# EAGLE board wordclock-r6-4x6 (EAGLE 5.11)
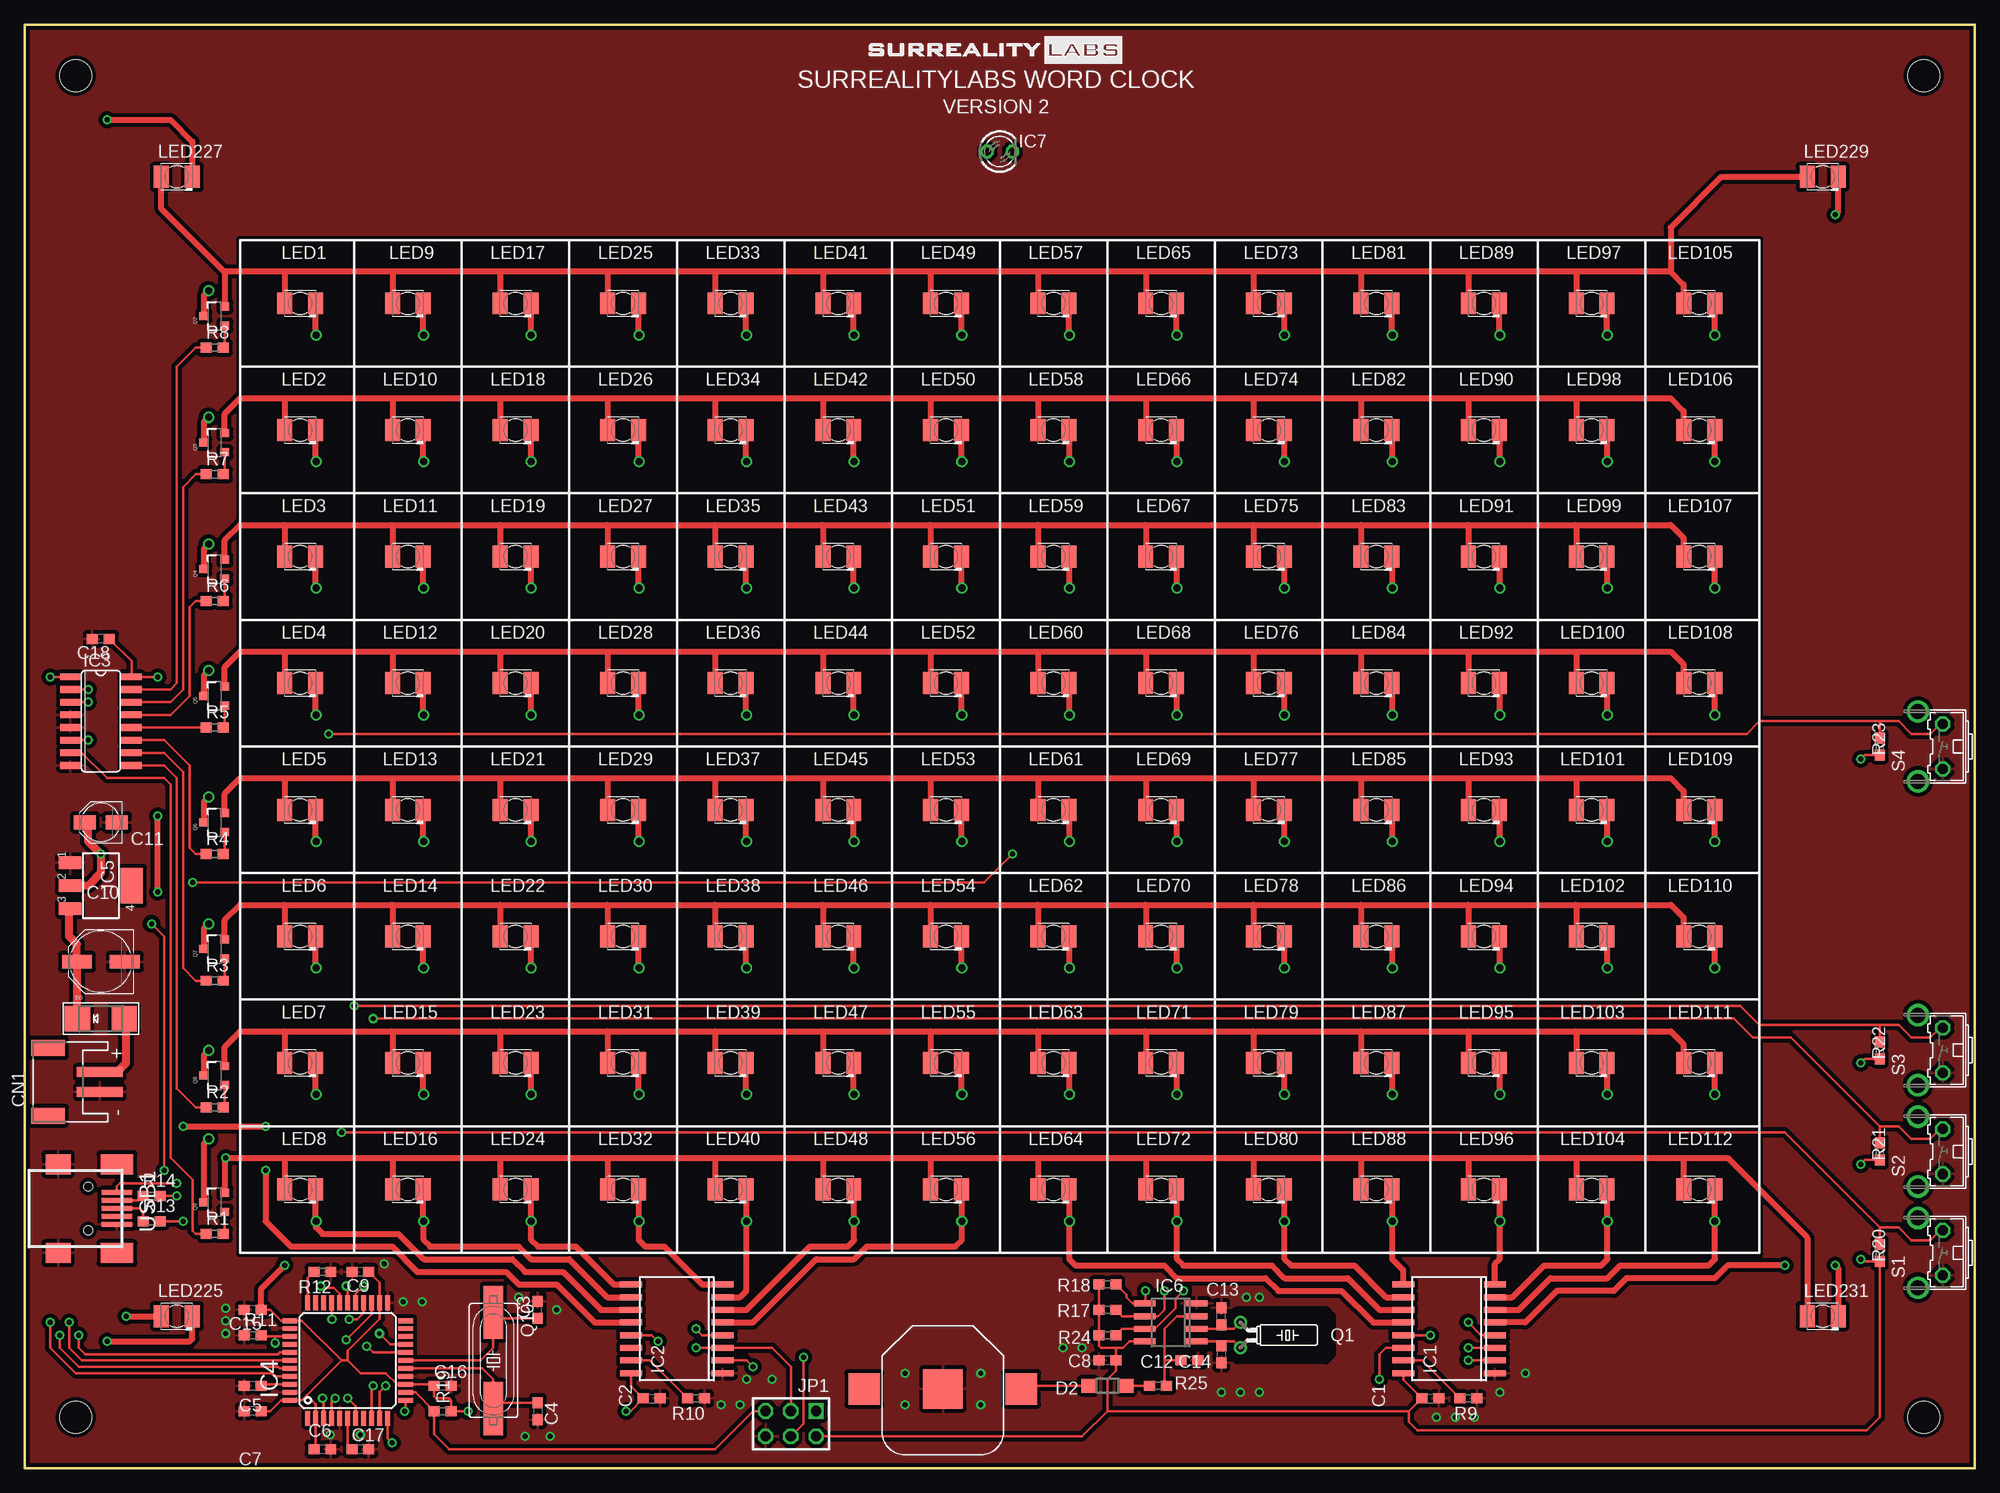
[diagram p0: board, top side]
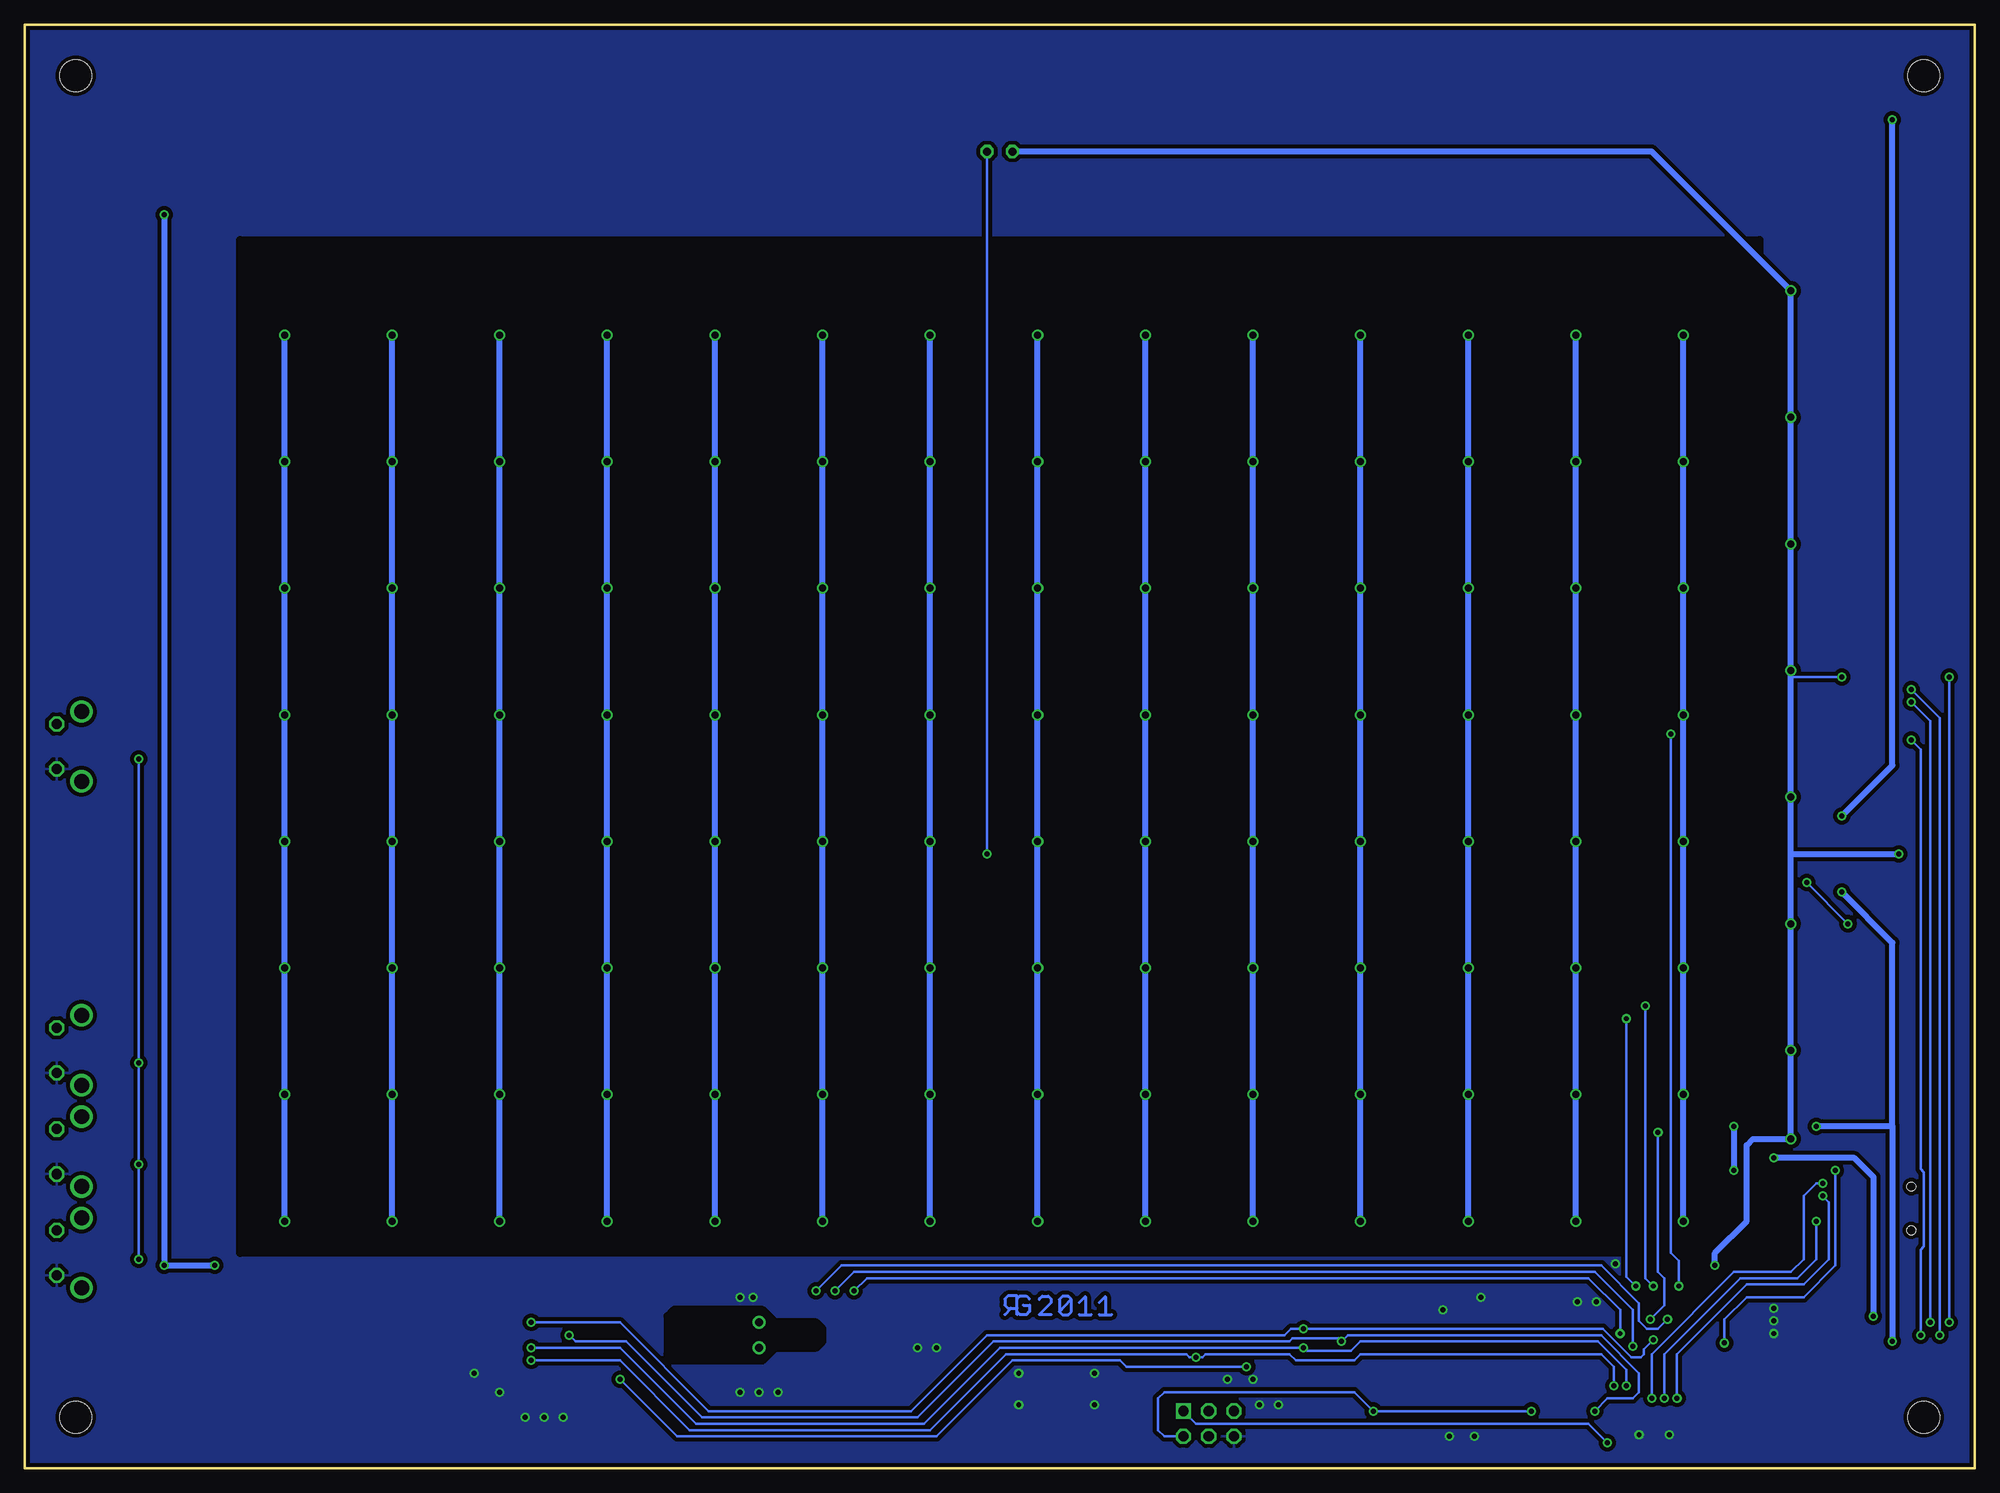
[diagram p1: board, bottom side, seen from below]

Size 195.58 x 144.78 mm. Coordinates in mm from the lower left corner, seen from the top.
Outline: 0,144.78 0,0 195.58,0 195.58,144.78 0,144.78
Copper layers (1*16): Top 0.035mm / dielectric 1.5mm / Bottom 0.035mm
Design rules "default *": minimum track width 10mil, minimum drill 19mil, track to track 10mil, track to pad 10mil, pad to pad 10mil, via to via 10mil, smd to smd 10mil, copper to edge 10mil, drill to drill 8mil, minimum pad ring 10mil, minimum via ring 8mil, stop-mask expansion 4mil, vias tented up to drill 20mil, thermal gap 16mil
Holes 3.2 mm at 5.08,139.7 190.5,139.7 190.5,5.08 5.08,5.08
tRestrict: 16 lines
bRestrict: 16 lines

## Footprints (pad centres in the part's own frame; a part is rotated, then mirrored left to right if it is on the bottom)
BATTCON_12MM = smd 3.962 x 3.962: GND 0,0 | smd 3.175 x 3.175: PWR@1 -7.874,0; PWR@2 7.874,0
C0603 = smd 1.1 x 1: 1 -0.85,0; 2 0.85,0
PANASONIC_D = smd 3 x 1.4: + 2.4,0; - -2.4,0
PANASONIC_B = smd 2.2 x 1.4: + 1.6,0; - -1.6,0
JST-PH-2-SMT-RA = smd 1 x 4.6: 1 1,-3.7; 2 -1,-3.7 | smd 1.6 x 3.4: NC1 -3.4,1.5; NC2 3.4,1.5
SOD123 = smd 1.4 x 1.4: A 1.9,0; C -1.9,0
SMADIODE = smd 2.54 x 2.54: A 2.349,0; C -2.349,0
SOIC-16-MFG = smd 0.6 x 2.2: 1 -3.81,-4.6; 2 -2.54,-4.6; 3 -1.27,-4.6; 4 0,-4.6; 5 1.27,-4.6; 6 2.54,-4.6; 7 3.81,-4.6; 8 5.08,-4.6; 9 5.08,4.6; 10 3.81,4.6; 11 2.54,4.6; 12 1.27,4.6; 13 0,4.6; 14 -1.27,4.6; 15 -2.54,4.6; 16 -3.81,4.6
SO16 = smd 0.66 x 2.032: 1 -4.445,-3.073; 2 -3.175,-3.073; 3 -1.905,-3.073; 4 -0.635,-3.073; 5 0.635,-3.073; 6 1.905,-3.073; 7 3.175,-3.073; 8 4.445,-3.073; 9 4.445,3.073; 10 3.175,3.073; 11 1.905,3.073; 12 0.635,3.073; 13 -0.635,3.073; 14 -1.905,3.073; 15 -3.175,3.073; 16 -4.445,3.073
TQFP44 = smd 1.5 x 0.5: 1 -5.8,4; 2 -5.8,3.2; 3 -5.8,2.4; 4 -5.8,1.6; 5 -5.8,0.8; 6 -5.8,0; 7 -5.8,-0.8; 8 -5.8,-1.6; 9 -5.8,-2.4; 10 -5.8,-3.2; 11 -5.8,-4; 23 5.8,-4; 24 5.8,-3.2; 25 5.8,-2.4; 26 5.8,-1.6; 27 5.8,-0.8; 28 5.8,0; 29 5.8,0.8; 30 5.8,1.6; 31 5.8,2.4; 32 5.8,3.2; 33 5.8,4 | smd 0.5 x 1.5: 12 -4,-5.8; 13 -3.2,-5.8; 14 -2.4,-5.8; 15 -1.6,-5.8; 16 -0.8,-5.8; 17 0,-5.8; 18 0.8,-5.8; 19 1.6,-5.8; 20 2.4,-5.8; 21 3.2,-5.8; 22 4,-5.8; 34 4,5.8; 35 3.2,5.8; 36 2.4,5.8; 37 1.6,5.8; 38 0.8,5.8; 39 0,5.8; 40 -0.8,5.8; 41 -1.6,5.8; 42 -2.4,5.8; 43 -3.2,5.8; 44 -4,5.8
SOT223 = smd 1.219 x 2.235: 1 -2.311,-3.099; 2 0,-3.099; 3 2.311,-3.099 | smd 3.6 x 2.2: 4 0,3.099
SOIC8 = smd 0.6 x 2.2: 1 -1.905,-2.6; 2 -0.635,-2.6; 3 0.635,-2.6; 4 1.905,-2.6; 5 1.905,2.6; 6 0.635,2.6; 7 -0.635,2.6; 8 -1.905,2.6
LED3MM = drill 0.813 octagon: A -1.27,0; K 1.27,0
AVR-ISP-6 = drill 1.016 square: 1 -2.54,-1.27 | drill 1.016 octagon: 2 -2.54,1.27; 3 0,-1.27; 4 0,1.27; 5 2.54,-1.27; 6 2.54,1.27
KA-3528ASYC = smd 1.5 x 2.2: A -1.55,0; C 1.55,0
TC26H = drill 0.813 round: 1 -1.27,0; 2 1.27,0
SOT23-3 = smd 0.8 x 0.9: 1 -0.95,-1; 2 0.95,-1; 3 0,1.1
HC49UP = smd 5.334 x 1.93: 1 -4.826,0; 2 4.826,0
R0603 = smd 1.1 x 1: 1 -0.85,0; 2 0.85,0
B3F-31XX = drill 1.016 octagon: 1 -2.261,-1.245; 2 2.261,-1.245 | drill 1.499 pad 2.159 round: 3 -3.505,1.245; 4 3.505,1.245
USB-MB-RAYMOND = smd 0.5 x 3.1: D+ 0,4.15; D- -0.8,4.15; GND 1.6,4.15; ID 0.8,4.15; VBUS -1.6,4.15 | smd 2 x 2.5: GND@1 -4.45,-1.75; GND@3 4.45,-1.75 | smd 2 x 3.3: GND@2 -4.45,4.15; GND@4 4.45,4.15 | hole 0.9: -2.2,1.25; 2.2,1.25

## Placement (x,y rotation side)
BAT1  [BATTCON_12MM]  92.08,7.94 180 top
C1  [C0603]  140.97,6.98 0 top
C2  [C0603]  62.86,6.98 0 top
C3  [C0603]  51.44,15.88 90 top
C4  [C0603]  51.44,5.71 270 top
C5  [C0603]  22.86,8.25 180 top
C6  [C0603]  29.84,1.91 0 top
C7  [C0603]  22.86,5.71 180 top
C8  [C0603]  108.59,10.79 180 top
C9  [C0603]  33.66,19.68 180 top
C10  100u  [PANASONIC_D]  7.62,50.8 180 top
C11  10u  [PANASONIC_B]  7.62,64.77 180 top
C12  [C0603]  116.84,10.79 0 top
C13  8p  [C0603]  120.02,15.24 90 top
C14  10p  [C0603]  120.02,11.43 270 top
C15  [C0603]  22.86,15.88 180 top
C16  [C0603]  41.91,8.25 0 top
C17  [C0603]  33.66,1.91 0 top
C18  [C0603]  7.62,83.19 180 top
CN1  [JST-PH-2-SMT-RA]  3.81,38.73 90 top
D2  MBR0520LT  [SOD123]  108.59,8.25 180 top
D3  [SMADIODE]  7.62,45.09 0 top
IC1  A6275ELW-MFG  [SOIC-16-MFG]  142.88,13.33 90 top
IC2  A6275ELW-MFG  [SOIC-16-MFG]  65.41,13.33 90 top
IC3  74HC138D  [SO16]  7.62,74.93 270 top
IC4  ATMEGA32U4-AU  [TQFP44]  32.38,10.79 90 top
IC5  [SOT223]  7.62,58.42 270 top
IC6  DS1307Z  [SOIC8]  114.94,14.61 90 top
IC7  SFH310  [LED3MM]  97.79,132.08 0 top
JP1  AVR-ISP-6  [AVR-ISP-6]  76.83,4.45 180 top
LED1  [KA-3528ASYC]  27.62,116.84 0 top
LED2  [KA-3528ASYC]  27.62,104.14 0 top
LED3  [KA-3528ASYC]  27.62,91.44 0 top
LED4  [KA-3528ASYC]  27.62,78.74 0 top
LED5  [KA-3528ASYC]  27.62,66.04 0 top
LED6  [KA-3528ASYC]  27.62,53.34 0 top
LED7  [KA-3528ASYC]  27.62,40.64 0 top
LED8  [KA-3528ASYC]  27.62,27.94 0 top
LED9  [KA-3528ASYC]  38.42,116.84 0 top
LED10  [KA-3528ASYC]  38.42,104.14 0 top
LED11  [KA-3528ASYC]  38.42,91.44 0 top
LED12  [KA-3528ASYC]  38.42,78.74 0 top
LED13  [KA-3528ASYC]  38.42,66.04 0 top
LED14  [KA-3528ASYC]  38.42,53.34 0 top
LED15  [KA-3528ASYC]  38.42,40.64 0 top
LED16  [KA-3528ASYC]  38.42,27.94 0 top
LED17  [KA-3528ASYC]  49.21,116.84 0 top
LED18  [KA-3528ASYC]  49.21,104.14 0 top
LED19  [KA-3528ASYC]  49.21,91.44 0 top
LED20  [KA-3528ASYC]  49.21,78.74 0 top
LED21  [KA-3528ASYC]  49.21,66.04 0 top
LED22  [KA-3528ASYC]  49.21,53.34 0 top
LED23  [KA-3528ASYC]  49.21,40.64 0 top
LED24  [KA-3528ASYC]  49.21,27.94 0 top
LED25  [KA-3528ASYC]  60.01,116.84 0 top
LED26  [KA-3528ASYC]  60.01,104.14 0 top
LED27  [KA-3528ASYC]  60.01,91.44 0 top
LED28  [KA-3528ASYC]  60.01,78.74 0 top
LED29  [KA-3528ASYC]  60.01,66.04 0 top
LED30  [KA-3528ASYC]  60.01,53.34 0 top
LED31  [KA-3528ASYC]  60.01,40.64 0 top
LED32  [KA-3528ASYC]  60.01,27.94 0 top
LED33  [KA-3528ASYC]  70.8,116.84 0 top
LED34  [KA-3528ASYC]  70.8,104.14 0 top
LED35  [KA-3528ASYC]  70.8,91.44 0 top
LED36  [KA-3528ASYC]  70.8,78.74 0 top
LED37  [KA-3528ASYC]  70.8,66.04 0 top
LED38  [KA-3528ASYC]  70.8,53.34 0 top
LED39  [KA-3528ASYC]  70.8,40.64 0 top
LED40  [KA-3528ASYC]  70.8,27.94 0 top
LED41  [KA-3528ASYC]  81.6,116.84 0 top
LED42  [KA-3528ASYC]  81.6,104.14 0 top
LED43  [KA-3528ASYC]  81.6,91.44 0 top
LED44  [KA-3528ASYC]  81.6,78.74 0 top
LED45  [KA-3528ASYC]  81.6,66.04 0 top
LED46  [KA-3528ASYC]  81.6,53.34 0 top
LED47  [KA-3528ASYC]  81.6,40.64 0 top
LED48  [KA-3528ASYC]  81.6,27.94 0 top
LED49  [KA-3528ASYC]  92.39,116.84 0 top
LED50  [KA-3528ASYC]  92.39,104.14 0 top
LED51  [KA-3528ASYC]  92.39,91.44 0 top
LED52  [KA-3528ASYC]  92.39,78.74 0 top
LED53  [KA-3528ASYC]  92.39,66.04 0 top
LED54  [KA-3528ASYC]  92.39,53.34 0 top
LED55  [KA-3528ASYC]  92.39,40.64 0 top
LED56  [KA-3528ASYC]  92.39,27.94 0 top
LED57  [KA-3528ASYC]  103.19,116.84 0 top
LED58  [KA-3528ASYC]  103.19,104.14 0 top
LED59  [KA-3528ASYC]  103.19,91.44 0 top
LED60  [KA-3528ASYC]  103.19,78.74 0 top
LED61  [KA-3528ASYC]  103.19,66.04 0 top
LED62  [KA-3528ASYC]  103.19,53.34 0 top
LED63  [KA-3528ASYC]  103.19,40.64 0 top
LED64  [KA-3528ASYC]  103.19,27.94 0 top
LED65  [KA-3528ASYC]  113.98,116.84 0 top
LED66  [KA-3528ASYC]  113.98,104.14 0 top
LED67  [KA-3528ASYC]  113.98,91.44 0 top
LED68  [KA-3528ASYC]  113.98,78.74 0 top
LED69  [KA-3528ASYC]  113.98,66.04 0 top
LED70  [KA-3528ASYC]  113.98,53.34 0 top
LED71  [KA-3528ASYC]  113.98,40.64 0 top
LED72  [KA-3528ASYC]  113.98,27.94 0 top
LED73  [KA-3528ASYC]  124.78,116.84 0 top
LED74  [KA-3528ASYC]  124.78,104.14 0 top
LED75  [KA-3528ASYC]  124.78,91.44 0 top
LED76  [KA-3528ASYC]  124.78,78.74 0 top
LED77  [KA-3528ASYC]  124.78,66.04 0 top
LED78  [KA-3528ASYC]  124.78,53.34 0 top
LED79  [KA-3528ASYC]  124.78,40.64 0 top
LED80  [KA-3528ASYC]  124.78,27.94 0 top
LED81  [KA-3528ASYC]  135.57,116.84 0 top
LED82  [KA-3528ASYC]  135.57,104.14 0 top
LED83  [KA-3528ASYC]  135.57,91.44 0 top
LED84  [KA-3528ASYC]  135.57,78.74 0 top
LED85  [KA-3528ASYC]  135.57,66.04 0 top
LED86  [KA-3528ASYC]  135.57,53.34 0 top
LED87  [KA-3528ASYC]  135.57,40.64 0 top
LED88  [KA-3528ASYC]  135.57,27.94 0 top
LED89  [KA-3528ASYC]  146.37,116.84 0 top
LED90  [KA-3528ASYC]  146.37,104.14 0 top
LED91  [KA-3528ASYC]  146.37,91.44 0 top
LED92  [KA-3528ASYC]  146.37,78.74 0 top
LED93  [KA-3528ASYC]  146.37,66.04 0 top
LED94  [KA-3528ASYC]  146.37,53.34 0 top
LED95  [KA-3528ASYC]  146.37,40.64 0 top
LED96  [KA-3528ASYC]  146.37,27.94 0 top
LED97  [KA-3528ASYC]  157.16,116.84 0 top
LED98  [KA-3528ASYC]  157.16,104.14 0 top
LED99  [KA-3528ASYC]  157.16,91.44 0 top
LED100  [KA-3528ASYC]  157.16,78.74 0 top
LED101  [KA-3528ASYC]  157.16,66.04 0 top
LED102  [KA-3528ASYC]  157.16,53.34 0 top
LED103  [KA-3528ASYC]  157.16,40.64 0 top
LED104  [KA-3528ASYC]  157.16,27.94 0 top
LED105  [KA-3528ASYC]  167.96,116.84 0 top
LED106  [KA-3528ASYC]  167.96,104.14 0 top
LED107  [KA-3528ASYC]  167.96,91.44 0 top
LED108  [KA-3528ASYC]  167.96,78.74 0 top
LED109  [KA-3528ASYC]  167.96,66.04 0 top
LED110  [KA-3528ASYC]  167.96,53.34 0 top
LED111  [KA-3528ASYC]  167.96,40.64 0 top
LED112  [KA-3528ASYC]  167.96,27.94 0 top
LED225  [KA-3528ASYC]  15.24,15.24 0 top
LED227  [KA-3528ASYC]  15.24,129.54 0 top
LED229  [KA-3528ASYC]  180.34,129.54 0 top
LED231  [KA-3528ASYC]  180.34,15.24 0 top
Q1  [TC26H]  121.92,13.33 270 top
Q2  MOSFET-PCHANNELSMD  [SOT23-3]  19.05,115.57 90 top
Q3  MOSFET-PCHANNELSMD  [SOT23-3]  19.05,102.87 90 top
Q4  MOSFET-PCHANNELSMD  [SOT23-3]  19.05,90.17 90 top
Q5  MOSFET-PCHANNELSMD  [SOT23-3]  19.05,77.47 90 top
Q6  MOSFET-PCHANNELSMD  [SOT23-3]  19.05,64.77 90 top
Q7  MOSFET-PCHANNELSMD  [SOT23-3]  19.05,52.07 90 top
Q8  MOSFET-PCHANNELSMD  [SOT23-3]  19.05,39.37 90 top
Q9  MOSFET-PCHANNELSMD  [SOT23-3]  19.05,26.67 90 top
Q10  [HC49UP]  46.99,10.79 270 top
R1  [R0603]  19.05,23.5 0 top
R2  [R0603]  19.05,36.2 0 top
R3  [R0603]  19.05,48.89 0 top
R4  [R0603]  19.05,61.59 0 top
R5  [R0603]  19.05,74.3 0 top
R6  [R0603]  19.05,87 0 top
R7  [R0603]  19.05,99.7 0 top
R8  [R0603]  19.05,112.4 0 top
R9  [R0603]  144.78,6.98 180 top
R10  [R0603]  67.31,6.98 180 top
R11  [R0603]  22.86,13.33 0 top
R12  [R0603]  29.84,19.68 180 top
R13  [R0603]  12.7,24.77 0 top
R14  [R0603]  12.7,27.3 0 top
R17  [R0603]  108.59,15.88 180 top
R18  [R0603]  108.59,18.41 180 top
R19  [R0603]  41.91,5.71 0 top
R20  [R0603]  186.06,21.59 270 top
R21  [R0603]  186.06,31.75 270 top
R22  [R0603]  186.06,41.91 270 top
R23  [R0603]  186.06,72.39 270 top
R24  [R0603]  108.59,13.33 180 top
R25  [R0603]  113.67,8.25 180 top
S1  [B3F-31XX]  191.13,21.59 90 top
S2  [B3F-31XX]  191.13,31.75 90 top
S3  [B3F-31XX]  191.13,41.91 90 top
S4  [B3F-31XX]  191.13,72.39 90 top
U$1  [RGLOGO_SMALL_2011]  95.89,15.24 0 bottom
U$2  [SURREALITY_LOGO_SILK]  84.45,140.97 0 top
USB1  USB-RAYMOND  [USB-MB-RAYMOND]  5.08,26.04 270 top

## Library data of the parts
BAT1 = sfe-sparkfun
C1-C18 R1-R14 R17-R25 = rcl
CN1 D3 IC4 = adafruit
D2 = diode
IC1 IC2 = rbg-allegro-ledcontrol
IC3 = 74xx-us
IC5 = v-reg-3
IC6 = ds1307_pcf8583
IC7 = 0-svo
JP1 = avr-5-4.16
LED1-LED112 LED225 LED227 LED229 LED231 = led
Q1 = crystal; DIGIKEY: 300-8761-ND; OC_FARNELL: unknown; OC_NEWARK: unknown
Q2-Q9 = SparkFun
Q10 = crystal; OC_FARNELL: unknown; OC_NEWARK: unknown
S1-S4 = switch-omron
U$1 U$2 = rbg-logos
USB1 = con-usb-2

## Nets
+5V: C1.1 C2.1 C6.1 C7.1 C8.1 C9.1 C11.+ C15.1 C16.1 C18.1 IC1.16 IC2.16 IC3.16 IC4.2 IC4.14 IC4.24 IC4.34 IC4.44 IC5.2 IC6.8 IC7.A JP1.2 Q2.3 Q3.3 Q4.3 Q5.3 Q6.3 Q7.3 Q8.3 Q9.3 R17.2 R18.2 R19.2 R20.2 R21.2 R22.2 R23.2 R24.2
BRIGHT: IC1.13 IC2.13 IC4.12
BUTTON1: IC4.26 R20.1 S1.2
BUTTON2: IC4.27 R21.1 S2.2
BUTTON3: IC4.28 R22.1 S3.2
BUTTON4: IC4.29 R23.1 S4.2
COL1: IC1.5 LED229.C LED231.C
COL2: IC1.6 LED105.C LED106.C LED107.C LED108.C LED109.C LED110.C LED111.C LED112.C
COL3: IC1.7 LED97.C LED98.C LED99.C LED100.C LED101.C LED102.C LED103.C LED104.C
COL4: IC1.8 LED89.C LED90.C LED91.C LED92.C LED93.C LED94.C LED95.C LED96.C
COL5: IC1.9 LED81.C LED82.C LED83.C LED84.C LED85.C LED86.C LED87.C LED88.C
COL6: IC1.10 LED73.C LED74.C LED75.C LED76.C LED77.C LED78.C LED79.C LED80.C
COL7: IC1.11 LED65.C LED66.C LED67.C LED68.C LED69.C LED70.C LED71.C LED72.C
COL8: IC1.12 LED57.C LED58.C LED59.C LED60.C LED61.C LED62.C LED63.C LED64.C
COL9: IC2.5 LED49.C LED50.C LED51.C LED52.C LED53.C LED54.C LED55.C LED56.C
COL10: IC2.6 LED41.C LED42.C LED43.C LED44.C LED45.C LED46.C LED47.C LED48.C
COL11: IC2.7 LED33.C LED34.C LED35.C LED36.C LED37.C LED38.C LED39.C LED40.C
COL12: IC2.8 LED25.C LED26.C LED27.C LED28.C LED29.C LED30.C LED31.C LED32.C
COL13: IC2.9 LED17.C LED18.C LED19.C LED20.C LED21.C LED22.C LED23.C LED24.C
COL14: IC2.10 LED9.C LED10.C LED11.C LED12.C LED13.C LED14.C LED15.C LED16.C
COL15: IC2.11 LED1.C LED2.C LED3.C LED4.C LED5.C LED6.C LED7.C LED8.C
COL16: IC2.12 LED225.C LED227.C
GND: BAT1.GND C1.2 C2.2 C3.2 C4.2 C5.2 C6.2 C7.2 C8.2 C9.2 C10.- C11.- C12.2 C13.2 C14.2 C15.2 C16.2 C17.2 C18.2 CN1.2 IC1.1 IC2.1 IC3.4 IC3.5 IC3.8 IC4.5 IC4.15 IC4.23 IC4.35 IC4.43 IC5.1 IC6.4 JP1.6 R9.1 R10.1 R11.1 R12.1 S1.1 S2.1 S3.1 S4.1 USB1.GND USB1.GND@1 USB1.GND@3
INT: IC4.30 IC6.7 R24.1
LIGHTSENSOR: IC4.36 IC7.K R11.2
LOAD: IC1.4 IC2.4 IC4.25
MISO: IC4.11 JP1.1
MOSI: IC1.2 IC4.10 JP1.4
N$1: C12.1 IC6.3 R25.1
N$2: D2.C R25.2
N$3: C3.1 IC4.17 Q10.1
N$4: C4.1 IC4.16 Q10.2
N$5: IC1.14 IC2.2
N$6: IC2.15 R10.2
N$7: IC1.15 R9.2
N$8: C17.1 IC4.6
N$9: IC4.33 R12.2
N$10: Q2.1 R8.2
N$11: Q3.1 R7.2
N$12: Q4.1 R6.2
N$13: Q5.1 R5.2
N$14: Q6.1 R4.2
N$16: Q7.1 R3.2
N$17: Q8.1 R2.2
N$18: Q9.1 R1.2
N$19: IC3.7 R1.1
N$20: IC3.9 R2.1
N$21: IC3.10 R3.1
N$22: IC3.11 R4.1
N$23: IC3.12 R5.1
N$24: IC3.13 R6.1
N$25: IC3.14 R7.1
N$26: IC3.15 R8.1
N$27: R13.1 USB1.D+
N$28: IC4.4 R13.2
N$29: IC4.3 R14.2
N$30: R14.1 USB1.D-
N$31: IC4.7 USB1.VBUS
N$37: C13.1 IC6.2 Q1.1
N$54: C5.1 IC4.42
N$55: C14.1 IC6.1 Q1.2
N$56: CN1.1 D3.A
N$57: C10.+ D3.C IC5.3
N$58: BAT1.PWR@1 D2.A
RESET: IC4.13 JP1.5 R19.1
ROW1: LED1.A LED9.A LED17.A LED25.A LED33.A LED41.A LED49.A LED57.A LED65.A LED73.A LED81.A LED89.A LED97.A LED105.A LED227.A LED229.A Q2.2
ROW2: LED2.A LED10.A LED18.A LED26.A LED34.A LED42.A LED50.A LED58.A LED66.A LED74.A LED82.A LED90.A LED98.A LED106.A Q3.2
ROW3: LED3.A LED11.A LED19.A LED27.A LED35.A LED43.A LED51.A LED59.A LED67.A LED75.A LED83.A LED91.A LED99.A LED107.A Q4.2
ROW4: LED4.A LED12.A LED20.A LED28.A LED36.A LED44.A LED52.A LED60.A LED68.A LED76.A LED84.A LED92.A LED100.A LED108.A Q5.2
ROW5: LED5.A LED13.A LED21.A LED29.A LED37.A LED45.A LED53.A LED61.A LED69.A LED77.A LED85.A LED93.A LED101.A LED109.A Q6.2
ROW6: LED6.A LED14.A LED22.A LED30.A LED38.A LED46.A LED54.A LED62.A LED70.A LED78.A LED86.A LED94.A LED102.A LED110.A Q7.2
ROW7: LED7.A LED15.A LED23.A LED31.A LED39.A LED47.A LED55.A LED63.A LED71.A LED79.A LED87.A LED95.A LED103.A LED111.A Q8.2
ROW8: LED8.A LED16.A LED24.A LED32.A LED40.A LED48.A LED56.A LED64.A LED72.A LED80.A LED88.A LED96.A LED104.A LED112.A LED225.A LED231.A Q9.2
ROWGATE: IC3.6 IC4.38
ROWSEL_A: IC3.1 IC4.41
ROWSEL_B: IC3.2 IC4.40
ROWSEL_C: IC3.3 IC4.39
RX: IC4.20
RXLED: IC4.8
SCK: IC1.3 IC2.3 IC4.9 JP1.3
SCL: IC4.18 IC6.6 R17.1
SDA: IC4.19 IC6.5 R18.1
TX: IC4.21
TXLED: IC4.22

## Tracks (layer width: path | path; a pad name or v marks a point on that pad's centre or on a via)
+5V  (via drill 0.5, 0.7)
  Top 0.254: C6.1 29.18,2.09 IC4.2 29.18,6.38 28.26,7.3 | C9.1 35.59,18.61 IC4.24 35.59,14.95 32.38,11.75 32.38,10.79 | R18.2 R17.2 R24.2 107.73,12.28 107.95,12.06 109.38,12.06 | 109.38,12.06 110.17,12.06 110.81,12.7 IC6.8 | 109.38,12.06 109.44,12.01 C8.1 109.44,9.74 108.59,8.89 108.59,5.71 | 31.75,10.79 28.26,7.3 | 28.26,7.3 27.75,6.79 IC4.44 25.69,6.79 24.61,5.71 C7.1 | 32.38,10.79 31.75,10.79 | 31.75,10.79 27.75,14.79 IC4.34 25.69,14.79 24.61,15.88 C15.1 | 32.38,10.79 33.66,9.53 36.2,9.53 37.33,8.39 IC4.14 40.92,8.39 C16.1 41.06,7.2 41.27,6.98 42.55,6.98 42.76,6.77 R19.2 v44.45,5.71 | C18.1 10.69,80.96 IC3.16 v13.33,79.38 | IC2.16 60.81,8.2 C2.1 60.75,5.71 v60.33,5.71 | IC1.16 138.28,8.83 C1.1 138.85,5.71 | 108.59,5.71 138.85,5.71 | 108.59,5.71 106.05,3.18 JP1.2 | v184.15,20.95 184.37,20.74 R20.2 186.06,5.08 184.78,3.81 139.7,3.81 138.85,4.66 138.85,5.71 | R23.2 184.57,71.54 v184.15,71.12 | R21.2 184.57,30.9 v184.15,30.48 | R22.2 184.57,41.06 v184.15,40.64
  Top 0.61: Q2.3 17.95,117.65 v18.41,118.11 | Q3.3 17.95,104.95 v18.41,105.41 | Q4.3 17.95,92.25 v18.41,92.71 | Q5.3 17.95,79.55 v18.41,80.01 | Q6.3 17.95,66.84 v18.41,67.31 | Q7.3 17.95,54.14 v18.41,54.61 | Q8.3 17.95,41.45 v18.41,41.91 | Q9.3 17.95,32.55 v18.41,33.02 | C15.1 23.71,18 v26.04,20.32
  Top 0.813: IC5.2 6.35,58.42 7.62,59.69 v7.62,61.59 6.35,62.86 6.35,64.44 C11.+
  Bottom 0.254: 18.41,79.38 v13.33,79.38 | JP1.2 81.28,3.18 81.92,3.81 81.92,6.98 81.28,7.62 62.23,7.62 v60.33,5.71 v44.45,5.71 | v184.15,20.95 v184.15,30.48 v184.15,40.64 v184.15,71.12
  Bottom 0.61: 18.41,61.59 v18.41,54.61 v18.41,41.91 v18.41,33.02 22.23,33.02 22.86,32.38 22.86,24.77 26.04,21.59 v26.04,20.32 | 18.41,61.59 v18.41,67.31 18.41,79.38 v18.41,80.01 v18.41,92.71 v18.41,105.41 v18.41,118.11 32.38,132.08 IC7.A | 18.41,61.59 v7.62,61.59
BRIGHT  (via drill 0.5)
  Top 0.254: v140.97,13.33 IC1.13 | v63.5,12.7 62.86,13.33 IC2.13 | IC4.12 38.19,5.8 v38.1,5.71
  Bottom 0.254: v140.97,13.33 140.34,12.7 135.25,12.7 127.64,5.08 106.05,5.08 98.42,12.7 68.74,12.7 68.42,13.02 63.82,13.02 v63.5,12.7 62.86,13.33 37.47,13.33 33.66,9.53 33.66,7.62 34.29,6.98 36.83,6.98 v38.1,5.71
BUTTON1  (via drill 0.5)
  Top 0.254: IC4.26 33.98,15.57 33.34,14.92 v32.54,14.92 | S1.2 192.13,23.85 191.13,22.86 189.23,22.86 187.96,24.13 186.06,24.13 | 186.06,24.13 R20.1 | 186.06,24.13 176.53,33.66 v31.75,33.66
  Bottom 0.254: v31.75,33.66 31.75,19.68 31.12,19.05 31.12,16.35 v32.54,14.92
BUTTON2  (via drill 0.5)
  Top 0.254: IC4.27 33.19,17.47 v33.97,18.26 | S2.2 192.13,34.01 191.13,33.02 189.23,33.02 187.96,34.29 186.06,34.29 | 186.06,34.29 R21.1 | 186.06,34.29 177.16,43.18 173.35,43.18 171.45,45.09 v34.92,45.09
  Bottom 0.254: v34.92,45.09 34.92,19.21 v33.97,18.26
BUTTON3  (via drill 0.5)
  Top 0.254: IC4.28 32.38,18.1 v32.23,18.26 | S3.2 192.13,44.17 191.13,43.18 189.23,43.18 187.96,44.45 186.06,44.45 | 186.06,44.45 R22.1 | 186.06,44.45 173.99,44.45 172.09,46.36 v33.02,46.36
  Bottom 0.254: v33.02,46.36 33.02,19.05 v32.23,18.26
BUTTON4  (via drill 0.5)
  Top 0.254: IC4.29 31.59,17.47 30.96,18.1 29.84,18.1 v29.69,18.26 | S4.2 192.13,74.65 191.13,73.66 189.23,73.66 187.96,74.93 186.06,74.93 | 186.06,74.93 R23.1 | 186.06,74.93 173.99,74.93 172.72,73.66 v30.48,73.66
  Bottom 0.254: v30.48,73.66 30.48,21.59 29.69,20.8 v29.69,18.26
COL1  (via drill 0.5)
  Top 0.61: IC1.5 150.5,14.61 153.67,17.78 159.38,17.78 160.66,19.05 169.55,19.05 170.81,20.32 v176.53,20.32 | LED231.C 181.89,20.04 v181.61,20.32 | LED229.C 181.89,126.01 v181.61,125.73
  Bottom 0.61: v176.53,20.32 v181.61,20.32 v181.61,125.73
COL2  (via drill 0.7)
  Top 0.61: LED105.C 169.51,113.7 v169.55,113.67 | LED112.C 169.55,27.9 v169.55,24.77 169.55,20.95 168.91,20.32 160.02,20.32 158.75,19.05 153.03,19.05 149.86,15.88 IC1.6 | LED106.C 169.55,104.14 v169.55,100.97 | LED107.C 169.55,91.44 v169.55,88.27 | LED108.C 169.55,78.74 v169.55,75.56 | LED109.C 169.55,66.04 v169.55,62.86 | LED111.C 169.55,40.64 v169.55,37.47 | LED110.C 169.55,53.34 v169.55,50.16
  Bottom 0.61: v169.55,24.77 v169.55,37.47 v169.55,50.16 v169.55,62.86 v169.55,75.56 v169.55,88.27 v169.55,100.97 v169.55,113.67
COL3  (via drill 0.7)
  Top 0.61: LED97.C 158.71,113.7 v158.75,113.67 | LED104.C 158.75,27.9 v158.75,24.77 158.75,20.95 158.12,20.32 152.4,20.32 149.22,17.14 IC1.7 | LED98.C 158.75,104.14 v158.75,100.97 | LED99.C 158.75,91.44 v158.75,88.27 | LED100.C 158.75,78.74 v158.75,75.56 | LED101.C 158.75,66.04 v158.75,62.86 | LED103.C 158.75,40.64 v158.75,37.47 | LED102.C 158.75,53.34 v158.75,50.16
  Bottom 0.61: v158.75,24.77 v158.75,37.47 v158.75,50.16 v158.75,62.86 v158.75,75.56 v158.75,88.27 v158.75,100.97 v158.75,113.67
COL4  (via drill 0.7)
  Top 0.61: LED89.C 147.92,113.7 v147.95,113.67 | LED96.C 147.95,27.9 v147.95,24.77 147.95,20.95 147.47,20.48 IC1.8 | LED90.C 147.95,104.14 v147.95,100.97 | LED91.C 147.95,91.44 v147.95,88.27 | LED92.C 147.95,78.74 v147.95,75.56 | LED93.C 147.95,66.04 v147.95,62.86 | LED95.C 147.95,40.64 v147.95,37.47 | LED94.C 147.95,53.34 v147.95,50.16
  Bottom 0.61: v147.95,24.77 v147.95,37.47 v147.95,50.16 v147.95,62.86 v147.95,75.56 v147.95,88.27 v147.95,100.97 v147.95,113.67
COL5  (via drill 0.7)
  Top 0.61: LED81.C 137.12,113.7 v137.16,113.67 | LED88.C 137.16,27.9 v137.16,24.77 137.16,20.95 138.28,19.84 IC1.9 | LED82.C 137.16,104.14 v137.16,100.97 | LED83.C 137.16,91.44 v137.16,88.27 | LED84.C 137.16,78.74 v137.16,75.56 | LED85.C 137.16,66.04 v137.16,62.86 | LED87.C 137.16,40.64 v137.16,37.47 | LED86.C 137.16,53.34 v137.16,50.16
  Bottom 0.61: v137.16,24.77 v137.16,37.47 v137.16,50.16 v137.16,62.86 v137.16,75.56 v137.16,88.27 v137.16,100.97 v137.16,113.67
COL6  (via drill 0.7)
  Top 0.61: LED73.C 126.33,113.7 v126.37,113.67 | LED80.C 126.37,27.9 v126.37,24.77 126.37,20.95 127,20.32 133.35,20.32 136.53,17.14 IC1.10 | LED74.C 126.37,104.14 v126.37,100.97 | LED75.C 126.37,91.44 v126.37,88.27 | LED76.C 126.37,78.74 v126.37,75.56 | LED77.C 126.37,66.04 v126.37,62.86 | LED79.C 126.37,40.64 v126.37,37.47 | LED78.C 126.37,53.34 v126.37,50.16
  Bottom 0.61: v126.37,24.77 v126.37,37.47 v126.37,50.16 v126.37,62.86 v126.37,75.56 v126.37,88.27 v126.37,100.97 v126.37,113.67
COL7  (via drill 0.7)
  Top 0.61: LED65.C 115.53,113.7 v115.57,113.67 | LED72.C 115.57,27.9 v115.57,24.77 115.57,20.95 116.2,20.32 125.09,20.32 126.37,19.05 132.72,19.05 135.89,15.88 IC1.11 | LED66.C 115.57,104.14 v115.57,100.97 | LED67.C 115.57,91.44 v115.57,88.27 | LED68.C 115.57,78.74 v115.57,75.56 | LED69.C 115.57,66.04 v115.57,62.86 | LED71.C 115.57,40.64 v115.57,37.47 | LED70.C 115.57,53.34 v115.57,50.16
  Bottom 0.61: v115.57,24.77 v115.57,37.47 v115.57,50.16 v115.57,62.86 v115.57,75.56 v115.57,88.27 v115.57,100.97 v115.57,113.67
COL8  (via drill 0.7)
  Top 0.61: LED57.C 104.74,113.7 v104.78,113.67 | LED64.C 104.78,27.9 v104.78,24.77 104.78,20.95 105.41,20.32 114.3,20.32 115.57,19.05 124.46,19.05 125.73,17.78 132.08,17.78 135.25,14.61 IC1.12 | LED58.C 104.78,104.14 v104.78,100.97 | LED59.C 104.78,91.44 v104.78,88.27 | LED60.C 104.78,78.74 v104.78,75.56 | LED61.C 104.78,66.04 v104.78,62.86 | LED63.C 104.78,40.64 v104.78,37.47 | LED62.C 104.78,53.34 v104.78,50.16
  Bottom 0.61: v104.78,24.77 v104.78,37.47 v104.78,50.16 v104.78,62.86 v104.78,75.56 v104.78,88.27 v104.78,100.97 v104.78,113.67
COL9  (via drill 0.7)
  Top 0.61: LED49.C 93.94,113.7 v93.98,113.67 | LED56.C 93.98,27.9 v93.98,24.77 93.98,22.86 93.34,22.23 84.45,22.23 83.19,20.95 79.38,20.95 73.03,14.61 IC2.5 | LED50.C 93.94,101 v93.98,100.97 | LED51.C 93.94,88.3 v93.98,88.27 | LED52.C 93.94,75.6 v93.98,75.56 | LED53.C 93.94,62.9 v93.98,62.86 | LED55.C 93.94,37.5 v93.98,37.47 | LED54.C 93.94,50.2 v93.98,50.16
  Bottom 0.61: v93.98,24.77 v93.98,37.47 v93.98,50.16 v93.98,62.86 v93.98,75.56 v93.98,88.27 v93.98,100.97 v93.98,113.67
COL10  (via drill 0.7)
  Top 0.61: LED41.C 83.15,113.7 v83.19,113.67 | LED48.C 83.19,27.9 v83.19,24.77 83.19,22.86 82.55,22.23 78.74,22.23 72.39,15.88 IC2.6 | LED42.C 83.15,101 v83.19,100.97 | LED43.C 83.15,88.3 v83.19,88.27 | LED44.C 83.15,75.6 v83.19,75.56 | LED45.C 83.15,62.9 v83.19,62.86 | LED47.C 83.15,37.5 v83.19,37.47 | LED46.C 83.15,50.2 v83.19,50.16
  Bottom 0.61: v83.19,24.77 v83.19,37.47 v83.19,50.16 v83.19,62.86 v83.19,75.56 v83.19,88.27 v83.19,100.97 v83.19,113.67
COL11  (via drill 0.7)
  Top 0.61: LED33.C 72.35,113.7 v72.39,113.67 | LED40.C 72.39,27.9 v72.39,24.77 72.39,17.78 71.75,17.14 IC2.7 | LED34.C 72.35,101 v72.39,100.97 | LED35.C 72.35,88.3 v72.39,88.27 | LED36.C 72.35,75.6 v72.39,75.56 | LED37.C 72.35,62.9 v72.39,62.86 | LED39.C 72.35,37.5 v72.39,37.47 | LED38.C 72.35,50.2 v72.39,50.16
  Bottom 0.61: v72.39,24.77 v72.39,37.47 v72.39,50.16 v72.39,62.86 v72.39,75.56 v72.39,88.27 v72.39,100.97 v72.39,113.67
COL12  (via drill 0.7)
  Top 0.61: LED25.C 61.56,113.7 v61.59,113.67 | LED32.C 61.59,27.9 v61.59,24.77 61.59,22.86 62.23,22.23 64.14,22.23 67.94,18.41 IC2.8 | LED26.C 61.56,101 v61.59,100.97 | LED27.C 61.56,88.3 v61.59,88.27 | LED28.C 61.56,75.6 v61.59,75.56 | LED29.C 61.56,62.9 v61.59,62.86 | LED31.C 61.56,37.5 v61.59,37.47 | LED30.C 61.56,50.2 v61.59,50.16
  Bottom 0.61: v61.59,24.77 v61.59,37.47 v61.59,50.16 v61.59,62.86 v61.59,75.56 v61.59,88.27 v61.59,100.97 v61.59,113.67
COL13  (via drill 0.7)
  Top 0.61: LED17.C 50.76,113.7 v50.8,113.67 | LED24.C 50.8,27.9 v50.8,24.77 50.8,22.86 51.44,22.23 55.25,22.23 59.06,18.41 IC2.9 | LED23.C 50.76,37.5 v50.8,37.47 | LED22.C 50.76,50.2 v50.8,50.16 | LED21.C 50.76,62.9 v50.8,62.86 | LED20.C 50.76,75.6 v50.8,75.56 | LED19.C 50.76,88.3 v50.8,88.27 | LED18.C 50.76,101 v50.8,100.97
  Bottom 0.61: v50.8,24.77 v50.8,37.47 v50.8,50.16 v50.8,62.86 v50.8,75.56 v50.8,88.27 v50.8,100.97 v50.8,113.67
COL14  (via drill 0.7)
  Top 0.61: LED9.C 39.97,113.7 v40,113.67 | LED16.C 39.97,24.8 v40,24.77 40,22.86 40.64,22.23 49.53,22.23 50.8,20.95 54.61,20.95 58.42,17.14 IC2.10 | LED15.C 39.97,37.5 v40,37.47 | LED14.C 39.97,50.2 v40,50.16 | LED13.C 39.97,62.9 v40,62.86 | LED12.C 39.97,75.6 v40,75.56 | LED11.C 39.97,88.3 v40,88.27 | LED10.C 39.97,101 v40,100.97
  Bottom 0.61: v40,24.77 v40,37.47 v40,50.16 v40,62.86 v40,75.56 v40,88.27 v40,100.97 v40,113.67
COL15  (via drill 0.7)
  Top 0.61: LED1.C 29.17,113.7 v29.21,113.67 | LED2.C 29.17,101 v29.21,100.97 | LED3.C 29.17,88.3 v29.21,88.27 | LED4.C 29.17,75.6 v29.21,75.56 | LED5.C 29.17,62.9 v29.21,62.86 | LED7.C 29.17,37.5 v29.21,37.47 | LED8.C 29.17,24.8 v29.21,24.77 29.21,24.13 29.84,23.5 37.47,23.5 40,20.95 48.89,20.95 50.16,19.68 53.97,19.68 57.78,15.88 IC2.11 | LED6.C 29.17,50.2 v29.21,50.16
  Bottom 0.61: v29.21,24.77 v29.21,37.47 v29.21,50.16 v29.21,62.86 v29.21,75.56 v29.21,88.27 v29.21,100.97 v29.21,113.67
COL16  (via drill 0.5)
  Top 0.61: IC2.12 57.15,14.61 53.34,18.41 49.53,18.41 48.26,19.68 39.37,19.68 36.83,22.23 26.67,22.23 24.13,24.77 v24.13,29.84 | LED225.C 16.79,12.98 16.51,12.7 v8.25,12.7 | v13.33,57.78 v13.33,65.41 | LED227.C 16.79,133.07 14.61,135.25 v8.25,135.25 | v15.88,34.29 v24.13,34.29
  Bottom 0.61: v8.25,135.25 8.25,70.48 v13.33,65.41 | v13.33,57.78 8.25,52.7 8.25,34.29 | 8.25,34.29 v8.25,12.7 | 8.25,34.29 v15.88,34.29 | v24.13,34.29 v24.13,29.84
GND  (via drill 0.5)
  other vias: 120.02,7.62 121.92,7.62 123.83,7.62 141.6,5.08 143.51,5.08 145.41,5.08 150.5,9.53 147.95,7.62 122.56,17.14 123.83,17.14 106.05,12.06 104.14,12.06 88.27,9.53 88.27,6.35 95.89,6.35 95.89,9.53 72.39,8.89 74.93,8.89 69.85,6.35 71.75,6.35 50.16,3.18 52.7,3.18 53.34,15.88 49.53,17.14 30.64,3.33 33.66,3.33 36.04,20.48 37.94,16.67 39.85,16.67 20.16,13.49 20.16,16.03 20.16,14.76
  pour Bottom (isolate 0.406): -0.64,145.41 196.22,145.41 196.22,-0.64 -0.64,-0.64
  pour Top (isolate 0.406): -0.64,145.41 196.22,145.41 196.22,-0.64 -0.64,-0.64
INT  (via drill 0.5)
  Top 0.254: R24.1 110.07,13.97 IC6.7 113.35,13.97 115.41,16.03 115.41,16.99 v116.2,17.78 | IC4.30 30.79,14.93 v30.8,14.92
  Bottom 0.254: v116.2,17.78 113.67,20.32 37.47,20.32 33.66,16.51 33.66,14.76 32.86,13.97 31.75,13.97 v30.8,14.92
LIGHTSENSOR  (via drill 0.5)
  Top 0.254: R11.2 23.85,13.2 IC4.36 25.1,13.2 25.08,13.18 v25.08,12.54 | v13.97,29.84 13.97,53.34 v12.7,54.61 | v16.83,58.74 96.2,58.74 v99.06,61.59
  Bottom 0.254: v25.08,12.54 25.08,14.92 22.86,17.14 17.14,17.14 13.97,20.32 v13.97,29.84 | v12.7,54.61 v16.83,58.74 | v99.06,61.59 IC7.K
LOAD  (via drill 0.5)
  Top 0.254: v67.31,13.97 67.94,13.33 IC2.4 | v144.78,14.61 146.05,13.33 IC1.4 | IC4.25 34.78,15.42 v32.23,12.86
  Bottom 0.254: v144.78,14.61 135.89,14.61 127,5.71 106.68,5.71 99.06,13.33 69.22,13.33 68.58,13.97 v67.31,13.97 37.31,13.97 34.45,11.11 33.5,11.11 33.18,11.43 33.18,11.91 v32.23,12.86
MISO  (via drill 0.5)
  Top 0.254: IC4.11 36.38,2.98 v36.83,2.54
  Bottom 0.254: JP1.1 78.11,4.45 38.73,4.45 v36.83,2.54
MOSI  (via drill 0.5)
  Top 0.254: v144.78,10.79 IC1.2 | IC4.10 35.59,7.64 v36.2,8.25 | JP1.4 78.11,4.45 v78.11,11.11
  Bottom 0.254: v144.78,10.79 135.89,10.79 128.91,3.81 104.78,3.81 97.16,11.43 79.06,11.43 78.74,11.11 v78.11,11.11 77.47,11.11 77.15,11.43 68.74,11.43 68.1,10.79 62.23,10.79 61.59,11.43 37.47,11.43 36.2,10.16 v36.2,8.25
N$1
  Top 0.254: IC6.3 115.57,15.24 114.3,13.97 114.3,10.79 | 114.3,10.79 114.3,8.47 R25.1 | 114.3,10.79 C12.1
N$2
  Top 0.254: D2.C R25.2
N$3
  Top 0.254: IC4.17 45.72,10.79 46.99,12.06 Q10.1 47.59,15.02 C3.1
N$4
  Top 0.254: IC4.16 45.89,9.99 46.99,8.89 Q10.2 47.59,6.56 C4.1
N$5  (via drill 0.5)
  Top 0.254: IC2.2 72.39,10.79 v73.03,10.16 | v135.89,8.89 135.89,11.43 136.53,12.06 IC1.14
  Bottom 0.254: v73.03,10.16 85.09,10.16 85.73,10.79 96.52,10.79 104.14,3.18 130.17,3.18 v135.89,8.89
N$6
  Top 0.254: IC2.15 62.65,10.79 R10.2
N$7
  Top 0.254: IC1.15 140.12,10.79 R9.2
N$8
  Top 0.254: IC4.6 32.38,2.32 C17.1
N$9
  Top 0.254: IC4.33 28.38,19.07 R12.2
N$10
  Top 0.254: Q2.1 20.05,112.55 R8.2
N$11
  Top 0.254: Q3.1 20.05,99.84 R7.2
N$12
  Top 0.254: Q4.1 20.05,87.15 R6.2
N$13
  Top 0.254: Q5.1 20.05,74.44 R5.2
N$14
  Top 0.254: Q6.1 20.05,61.75 R4.2
N$16
  Top 0.254: Q7.1 20.05,49.05 R3.2
N$17
  Top 0.254: Q8.1 20.05,36.34 R2.2
N$18
  Top 0.254: Q9.1 20.05,23.64 R1.2
N$19
  Top 0.254: IC3.7 5.71,71.75 8.25,69.22 13.97,69.22 14.61,68.58 14.61,31.12 16.83,28.89 16.83,23.81 17.14,23.5 R1.1
N$20
  Top 0.254: IC3.9 13.97,70.48 15.24,69.22 15.24,38.1 17.14,36.2 R2.1
N$21
  Top 0.254: IC3.10 13.97,71.75 15.88,69.85 15.88,50.16 17.14,48.89 R3.1
N$22
  Top 0.254: IC3.11 13.97,73.03 16.51,70.48 16.51,62.23 17.14,61.59 R4.1
N$23
  Top 0.254: IC3.12 R5.1
N$24
  Top 0.254: IC3.13 14.61,75.56 16.51,77.47 16.51,86.36 17.14,87 R6.1
N$25
  Top 0.254: IC3.14 14.61,76.83 15.88,78.11 15.88,98.42 17.14,99.7 R7.1
N$26
  Top 0.254: IC3.15 14.61,78.11 15.24,78.74 15.24,110.49 17.14,112.4 R8.1
N$27
  Top 0.254: USB1.D+ 11.59,26.04 11.85,25.77 R13.1
N$28  (via drill 0.5)
  Top 0.254: v15.88,24.77 R13.2 | IC4.4 30.79,6.68 v31.12,6.98
  Bottom 0.254: v15.88,24.77 15.88,20.95 17.78,19.05 23.5,19.05 31.12,11.43 v31.12,6.98
N$29  (via drill 0.5)
  Top 0.254: v15.24,27.3 R14.2 | IC4.3 29.98,6.85 v29.84,6.98
  Bottom 0.254: v15.24,27.3 14.61,26.67 14.61,20.95 17.14,18.41 22.86,18.41 29.84,11.43 v29.84,6.98
N$30
  Top 0.254: USB1.D- 11.38,26.84 R14.1
N$31  (via drill 0.5)
  Top 0.254: IC4.7 33.19,6.19 v32.38,6.98 | USB1.VBUS 9.23,28.28 9.53,28.57 v15.24,28.57
  Bottom 0.254: v32.38,6.98 32.38,11.43 24.13,19.68 18.41,19.68 17.14,20.95 17.14,27.3 15.88,28.57 v15.24,28.57
N$37
  Top 0.254: IC6.2 120.02,13.97 | 120.02,13.97 121.28,13.97 Q1.1 | 120.02,13.97 C13.1
N$54
  Top 0.254: IC4.42 23.85,8.39 C5.1
N$55
  Top 0.254: IC6.1 120.02,12.7 | 120.02,12.7 121.28,12.7 Q1.2 | 120.02,12.7 C14.1
N$56
  Top 0.813: CN1.1 9.25,39.73 10.16,40.64 10.16,44.89 D3.A
N$57
  Top 0.813: D3.C 5.27,50.75 C10.+ 5.22,52.56 4.45,53.34 4.45,56.03 IC5.3
N$58
  Top 0.254: D2.A 100.27,8.25 BAT1.PWR@1
RESET
  Top 0.254: IC4.13 39.18,7.6 R19.1 41.06,3.39 42.55,1.91 69.22,1.91 73.03,5.71 JP1.5
ROW1
  Top 0.61: 36.83,120.02 26.04,120.02 | 47.62,120.02 36.83,120.02 | 58.42,120.02 47.62,120.02 | 69.22,120.02 58.42,120.02 | 80.01,120.02 69.22,120.02 | 90.81,120.02 80.01,120.02 | 101.6,120.02 90.81,120.02 | 112.4,120.02 101.6,120.02 | 123.19,120.02 112.4,120.02 | 133.98,120.02 123.19,120.02 | 144.78,120.02 133.98,120.02 | 155.58,120.02 144.78,120.02 | 165.1,120.02 155.58,120.02 | 165.1,120.02 166.37,118.75 166.37,116.88 LED105.A | LED97.A 155.61,119.98 155.58,120.02 | LED89.A 144.82,119.98 144.78,120.02 | LED81.A 134.02,119.98 133.98,120.02 | LED73.A 123.23,119.98 123.19,120.02 | LED65.A 112.43,119.98 112.4,120.02 | LED57.A 101.64,119.98 101.6,120.02 | LED49.A 90.84,119.98 90.81,120.02 | LED41.A 80.05,119.98 80.01,120.02 | LED33.A 69.25,119.98 69.22,120.02 | LED25.A 58.46,119.98 58.42,120.02 | LED17.A 47.66,119.98 47.62,120.02 | LED9.A 36.87,119.98 36.83,120.02 | LED1.A 26.07,119.98 26.04,120.02 | 165.1,120.02 165.1,124.46 170.18,129.54 LED229.A | 26.04,120.02 20,120.02 | Q2.2 20.05,119.97 20,120.02 | LED227.A 13.69,126.33 20,120.02
ROW2
  Top 0.61: Q3.2 20.05,105.78 21.59,107.31 26.04,107.31 | 26.04,107.31 36.83,107.31 | 36.83,107.31 47.62,107.31 | 47.62,107.31 58.42,107.31 | 58.42,107.31 69.22,107.31 | 69.22,107.31 80.01,107.31 | 80.01,107.31 90.81,107.31 | 90.81,107.31 101.6,107.31 | 101.6,107.31 112.4,107.31 | 112.4,107.31 123.19,107.31 | 123.19,107.31 133.98,107.31 | 133.98,107.31 144.78,107.31 | 144.78,107.31 155.58,107.31 | 155.58,107.31 165.1,107.31 166.37,106.05 166.37,104.18 LED106.A | LED2.A 26.07,107.28 26.04,107.31 | LED10.A 36.87,107.28 36.83,107.31 | LED18.A 47.66,107.28 47.62,107.31 | LED26.A 58.46,107.28 58.42,107.31 | LED34.A 69.25,107.28 69.22,107.31 | LED42.A 80.05,107.28 80.01,107.31 | LED50.A 90.84,107.28 90.81,107.31 | LED58.A 101.64,107.28 101.6,107.31 | LED66.A 112.43,107.28 112.4,107.31 | LED74.A 123.23,107.28 123.19,107.31 | LED82.A 134.02,107.28 133.98,107.31 | LED90.A 144.82,107.28 144.78,107.31 | LED98.A 155.61,107.28 155.58,107.31
ROW3
  Top 0.61: Q4.2 20.05,93.08 21.59,94.62 26.04,94.62 | 26.04,94.62 36.83,94.62 | 36.83,94.62 47.62,94.62 | 47.62,94.62 58.42,94.62 | 58.42,94.62 69.22,94.62 | 69.22,94.62 80.01,94.62 | 80.01,94.62 90.81,94.62 | 90.81,94.62 101.6,94.62 | 101.6,94.62 112.4,94.62 | 112.4,94.62 123.19,94.62 | 123.19,94.62 133.98,94.62 | 133.98,94.62 144.78,94.62 | 144.78,94.62 155.58,94.62 | 155.58,94.62 165.1,94.62 166.37,93.34 166.37,91.48 LED107.A | LED99.A 155.61,94.58 155.58,94.62 | LED91.A 144.82,94.58 144.78,94.62 | LED83.A 134.02,94.58 133.98,94.62 | LED75.A 123.23,94.58 123.19,94.62 | LED67.A 112.43,94.58 112.4,94.62 | LED59.A 101.64,94.58 101.6,94.62 | LED51.A 90.84,94.58 90.81,94.62 | LED43.A 80.05,94.58 80.01,94.62 | LED35.A 69.25,94.58 69.22,94.62 | LED27.A 58.46,94.58 58.42,94.62 | LED19.A 47.66,94.58 47.62,94.62 | LED11.A 36.87,94.58 36.83,94.62 | LED3.A 26.07,94.58 26.04,94.62
ROW4
  Top 0.61: Q5.2 20.05,80.38 21.59,81.92 26.04,81.92 | 26.04,81.92 36.83,81.92 | 36.83,81.92 47.62,81.92 | 47.62,81.92 58.42,81.92 | 58.42,81.92 69.22,81.92 | 69.22,81.92 80.01,81.92 | 80.01,81.92 90.81,81.92 | 90.81,81.92 101.6,81.92 | 101.6,81.92 112.4,81.92 | 112.4,81.92 123.19,81.92 | 123.19,81.92 133.98,81.92 | 133.98,81.92 144.78,81.92 | 144.78,81.92 155.58,81.92 | 155.58,81.92 165.1,81.92 166.37,80.64 166.37,78.78 LED108.A | LED4.A 26.07,81.88 26.04,81.92 | LED12.A 36.87,81.88 36.83,81.92 | LED20.A 47.66,81.88 47.62,81.92 | LED28.A 58.46,81.88 58.42,81.92 | LED36.A 69.25,81.88 69.22,81.92 | LED52.A 90.84,81.88 90.81,81.92 | LED60.A 101.64,81.88 101.6,81.92 | LED44.A 80.05,81.88 80.01,81.92 | LED68.A 112.43,81.88 112.4,81.92 | LED76.A 123.23,81.88 123.19,81.92 | LED84.A 134.02,81.88 133.98,81.92 | LED100.A 155.61,81.88 155.58,81.92 | LED92.A 144.82,81.88 144.78,81.92
ROW5
  Top 0.61: Q6.2 20.05,67.67 21.59,69.22 26.04,69.22 | 26.04,69.22 36.83,69.22 | 36.83,69.22 47.62,69.22 | 47.62,69.22 58.42,69.22 | 58.42,69.22 69.22,69.22 | 69.22,69.22 80.01,69.22 | 80.01,69.22 90.81,69.22 | 90.81,69.22 101.6,69.22 | 101.6,69.22 112.4,69.22 | 112.4,69.22 123.19,69.22 | 123.19,69.22 133.98,69.22 | 133.98,69.22 144.78,69.22 | 144.78,69.22 155.58,69.22 | 155.58,69.22 165.1,69.22 166.37,67.94 166.37,66.08 LED109.A | LED5.A 26.07,69.18 26.04,69.22 | LED13.A 36.87,69.18 36.83,69.22 | LED21.A 47.66,69.18 47.62,69.22 | LED29.A 58.46,69.18 58.42,69.22 | LED37.A 69.25,69.18 69.22,69.22 | LED45.A 80.05,69.18 80.01,69.22 | LED53.A 90.84,69.18 90.81,69.22 | LED61.A 101.64,69.18 101.6,69.22 | LED69.A 112.43,69.18 112.4,69.22 | LED77.A 123.23,69.18 123.19,69.22 | LED85.A 134.02,69.18 133.98,69.22 | LED93.A 144.82,69.18 144.78,69.22 | LED101.A 155.61,69.18 155.58,69.22
ROW6
  Top 0.61: Q7.2 20.05,54.97 21.59,56.52 26.04,56.52 | 26.04,56.52 36.83,56.52 | 36.83,56.52 47.62,56.52 | 47.62,56.52 58.42,56.52 | 58.42,56.52 69.22,56.52 | 69.22,56.52 80.01,56.52 | 80.01,56.52 90.81,56.52 | 90.81,56.52 101.6,56.52 | 101.6,56.52 112.4,56.52 | 112.4,56.52 123.19,56.52 | 123.19,56.52 133.98,56.52 | 133.98,56.52 144.78,56.52 | 144.78,56.52 155.58,56.52 | 155.58,56.52 165.1,56.52 166.37,55.25 166.37,53.38 LED110.A | LED6.A 26.07,56.48 26.04,56.52 | LED14.A 36.87,56.48 36.83,56.52 | LED22.A 47.66,56.48 47.62,56.52 | LED30.A 58.46,56.48 58.42,56.52 | LED38.A 69.25,56.48 69.22,56.52 | LED46.A 80.05,56.48 80.01,56.52 | LED54.A 90.84,56.48 90.81,56.52 | LED62.A 101.64,56.48 101.6,56.52 | LED70.A 112.43,56.48 112.4,56.52 | LED78.A 123.23,56.48 123.19,56.52 | LED86.A 134.02,56.48 133.98,56.52 | LED94.A 144.82,56.48 144.78,56.52 | LED102.A 155.61,56.48 155.58,56.52
ROW7
  Top 0.61: Q8.2 20.05,42.27 21.59,43.81 26.04,43.81 | 26.04,43.81 36.83,43.81 | 36.83,43.81 47.62,43.81 | 47.62,43.81 58.42,43.81 | 58.42,43.81 69.22,43.81 | 69.22,43.81 80.01,43.81 | 80.01,43.81 90.81,43.81 | 90.81,43.81 101.6,43.81 | 101.6,43.81 112.4,43.81 | 112.4,43.81 123.19,43.81 | 123.19,43.81 133.98,43.81 | 133.98,43.81 144.78,43.81 | 144.78,43.81 155.58,43.81 | 155.58,43.81 165.1,43.81 166.37,42.55 166.37,40.68 LED111.A | LED7.A 26.07,43.78 26.04,43.81 | LED15.A 36.87,43.78 36.83,43.81 | LED23.A 47.66,43.78 47.62,43.81 | LED31.A 58.46,43.78 58.42,43.81 | LED39.A 69.25,43.78 69.22,43.81 | LED47.A 80.05,43.78 80.01,43.81 | LED55.A 90.84,43.78 90.81,43.81 | LED63.A 101.64,43.78 101.6,43.81 | LED71.A 112.43,43.78 112.4,43.81 | LED79.A 123.23,43.78 123.19,43.81 | LED87.A 134.02,43.78 133.98,43.81 | LED95.A 144.82,43.78 144.78,43.81 | LED103.A 155.61,43.78 155.58,43.81
ROW8  (via drill 0.5)
  Top 0.61: 26.04,31.12 36.83,31.12 | 36.83,31.12 47.62,31.12 | 47.62,31.12 58.42,31.12 | 58.42,31.12 69.22,31.12 | 69.22,31.12 80.01,31.12 | 80.01,31.12 90.81,31.12 | 90.81,31.12 101.6,31.12 | 101.6,31.12 112.4,31.12 | 112.4,31.12 123.19,31.12 | 123.19,31.12 133.98,31.12 | 133.98,31.12 144.78,31.12 | 144.78,31.12 155.58,31.12 | LED112.A 166.37,27.98 166.37,31.12 | LED8.A 26.07,31.08 26.04,31.12 | LED16.A 36.87,31.08 36.83,31.12 | LED24.A 47.66,31.08 47.62,31.12 | LED32.A 58.46,31.08 58.42,31.12 | LED40.A 69.25,31.08 69.22,31.12 | LED48.A 80.05,31.08 80.01,31.12 | LED56.A 90.84,31.08 90.81,31.12 | LED64.A 101.64,31.08 101.6,31.12 | LED72.A 112.43,31.08 112.4,31.12 | LED80.A 123.23,31.08 123.19,31.12 | LED88.A 134.02,31.08 133.98,31.12 | LED96.A 144.82,31.08 144.78,31.12 | LED104.A 155.61,31.08 155.58,31.12 | 155.58,31.12 166.37,31.12 | 166.37,31.12 170.81,31.12 178.79,23.14 LED231.A | 26.04,31.12 v20.16,31.12 20.05,31 Q9.2 | v10.16,15.24 LED225.A
  Bottom 0.61: v20.16,31.12 12.06,31.12 10.16,29.21 v10.16,15.24
ROWGATE  (via drill 0.5)
  Top 0.254: IC4.38 25.57,11.6 25.4,11.43 6.03,11.43 5.4,12.06 v5.4,13.33 | v6.35,73.03 IC3.6
  Bottom 0.254: v5.4,13.33 5.4,21.91 5.08,22.23 5.08,29.69 5.4,30 5.4,72.07 v6.35,73.03
ROWSEL_A  (via drill 0.5)
  Top 0.254: IC4.41 25.09,9.2 24.77,9.53 5.08,9.53 2.54,12.06 v2.54,14.61 | v2.54,79.38 IC3.1
  Bottom 0.254: v2.54,14.61 v2.54,79.38
ROWSEL_B  (via drill 0.5)
  Top 0.254: IC4.40 25.57,9.99 25.4,10.16 5.4,10.16 3.49,12.06 v3.49,13.33 | v6.35,78.11 IC3.2
  Bottom 0.254: 6.45,78.11 v6.35,78.11 3.49,75.25 v3.49,13.33
ROWSEL_C  (via drill 0.5)
  Top 0.254: IC4.39 5.71,10.79 4.45,12.06 v4.45,14.61 | v6.35,76.83 IC3.3
  Bottom 0.254: v4.45,14.61 4.45,74.93 v6.35,76.83
SCK  (via drill 0.5)
  Top 0.254: v144.78,12.06 IC1.3 | v67.31,12.06 IC2.3 74.93,12.06 76.83,10.16 JP1.3 | IC4.9 34.78,8.12 v34.92,8.25
  Bottom 0.254: v144.78,12.06 135.89,12.06 128.27,4.45 105.41,4.45 97.79,12.06 v67.31,12.06 66.99,11.75 62.55,11.75 61.59,12.7 37.78,12.7 34.92,9.84 v34.92,8.25
SCL  (via drill 0.5)
  Top 0.254: R17.1 110.07,15.24 IC6.6 113.67,15.24 114.3,15.88 v114.3,17.78 | IC4.18 34.93,11.6 v34.29,12.22
  Bottom 0.254: v34.29,12.22 34.29,15.88 38.1,19.68 112.4,19.68 v114.3,17.78
SDA  (via drill 0.5)
  Top 0.254: R18.1 110.49,17.36 110.49,17.14 111.12,16.51 IC6.5 112.4,16.57 v112.4,17.78 | IC4.19 36.66,12.39 v35.56,13.49
  Bottom 0.254: v35.56,13.49 35.56,15.88 38.73,19.05 111.12,19.05 v112.4,17.78

## Text on the board
tNames: SURREALITYLABS WORD CLOCK | VERSION 2